# Altium PCB X4SIP02.PcbDoc
Units mm, origin at the board's own origin, x right, y up, seen from the top; angles counter-clockwise.
Board outline 16 x 16 mm, 6 copper layers (Top Layer, Inner1, Inner2, Inner3, Inner4, Bottom Layer), stack 0.811 mm thick; 15 components, 17 nets, 93 pads, 103 vias.
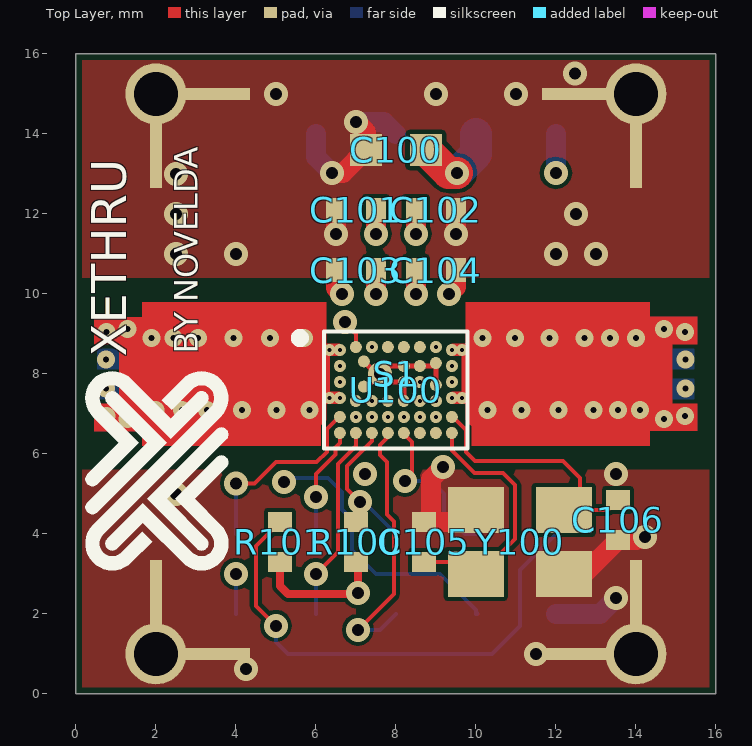
[diagram p0: Top Layer view]
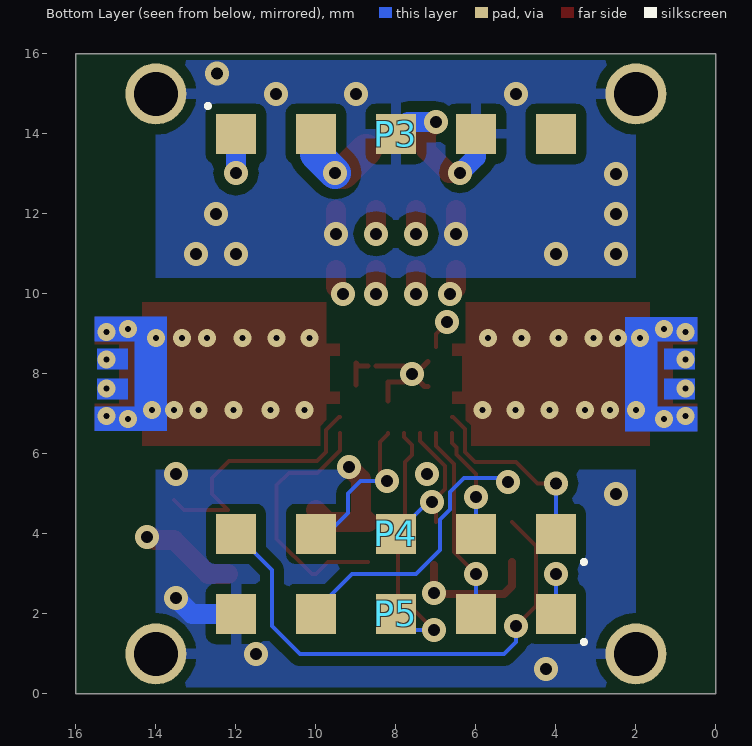
[diagram p1: Bottom Layer view, seen from below]
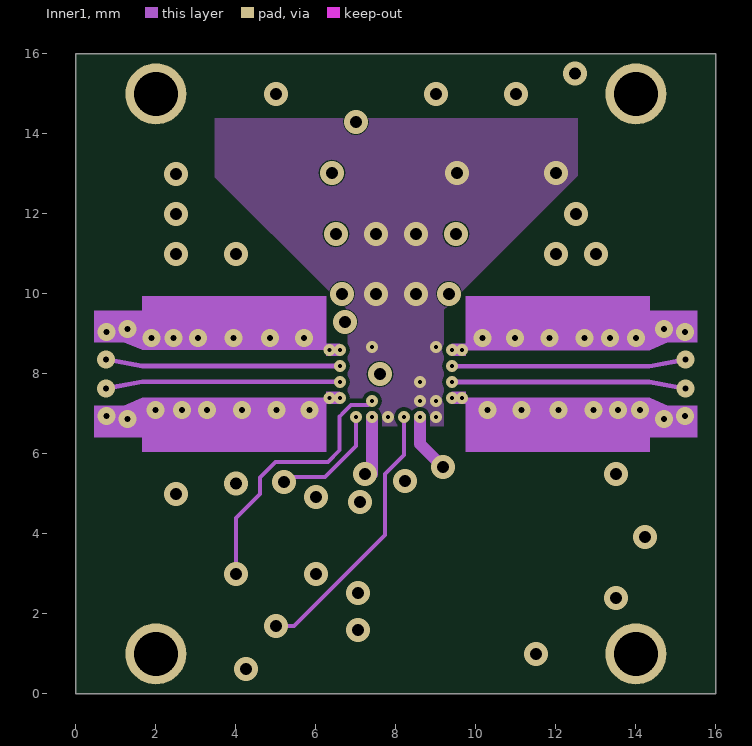
[diagram p2: Inner1]
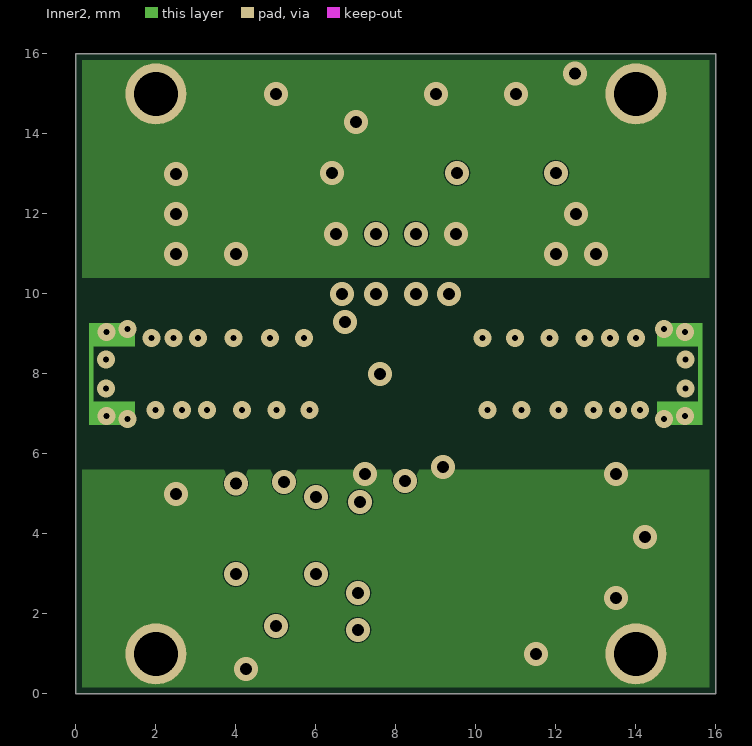
[diagram p3: Inner2]
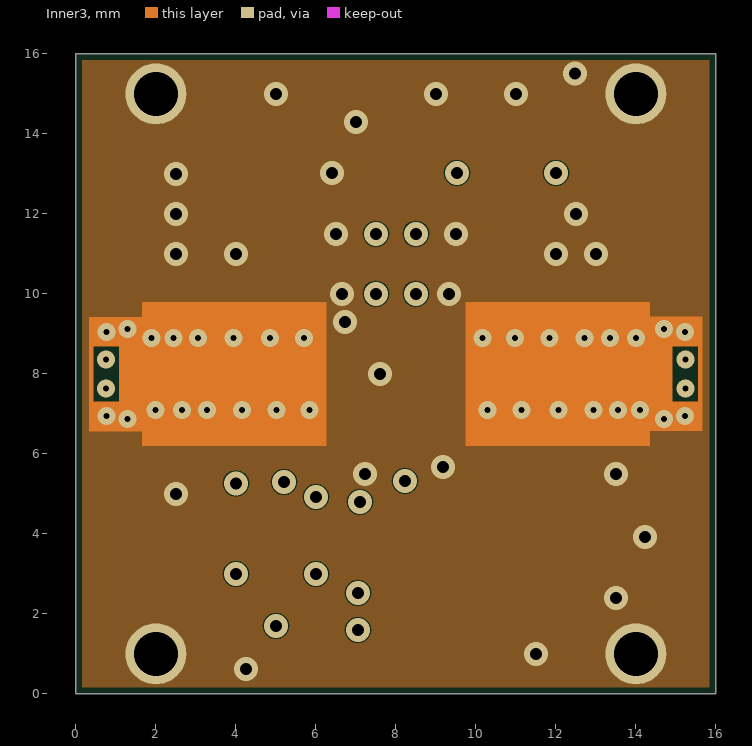
[diagram p4: Inner3]
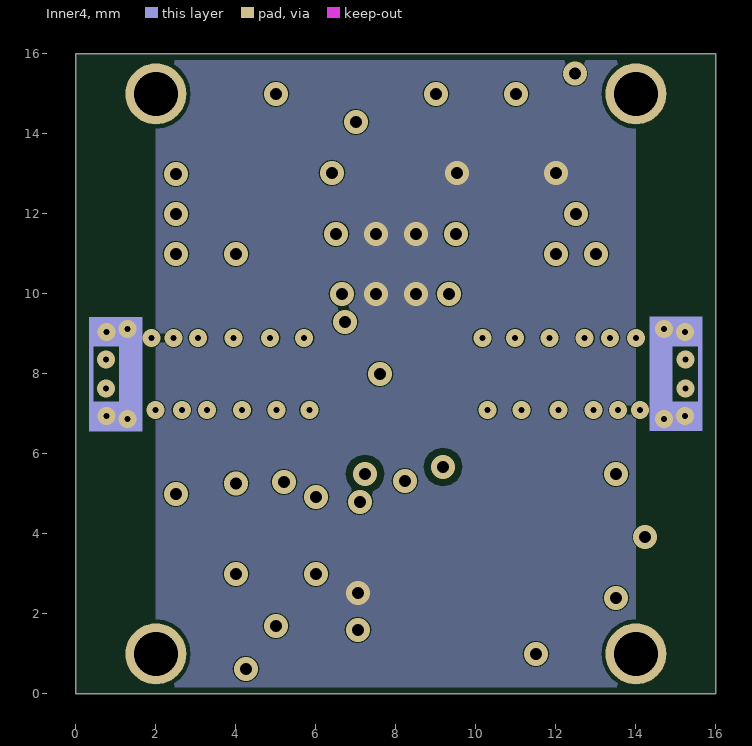
[diagram p5: Inner4]
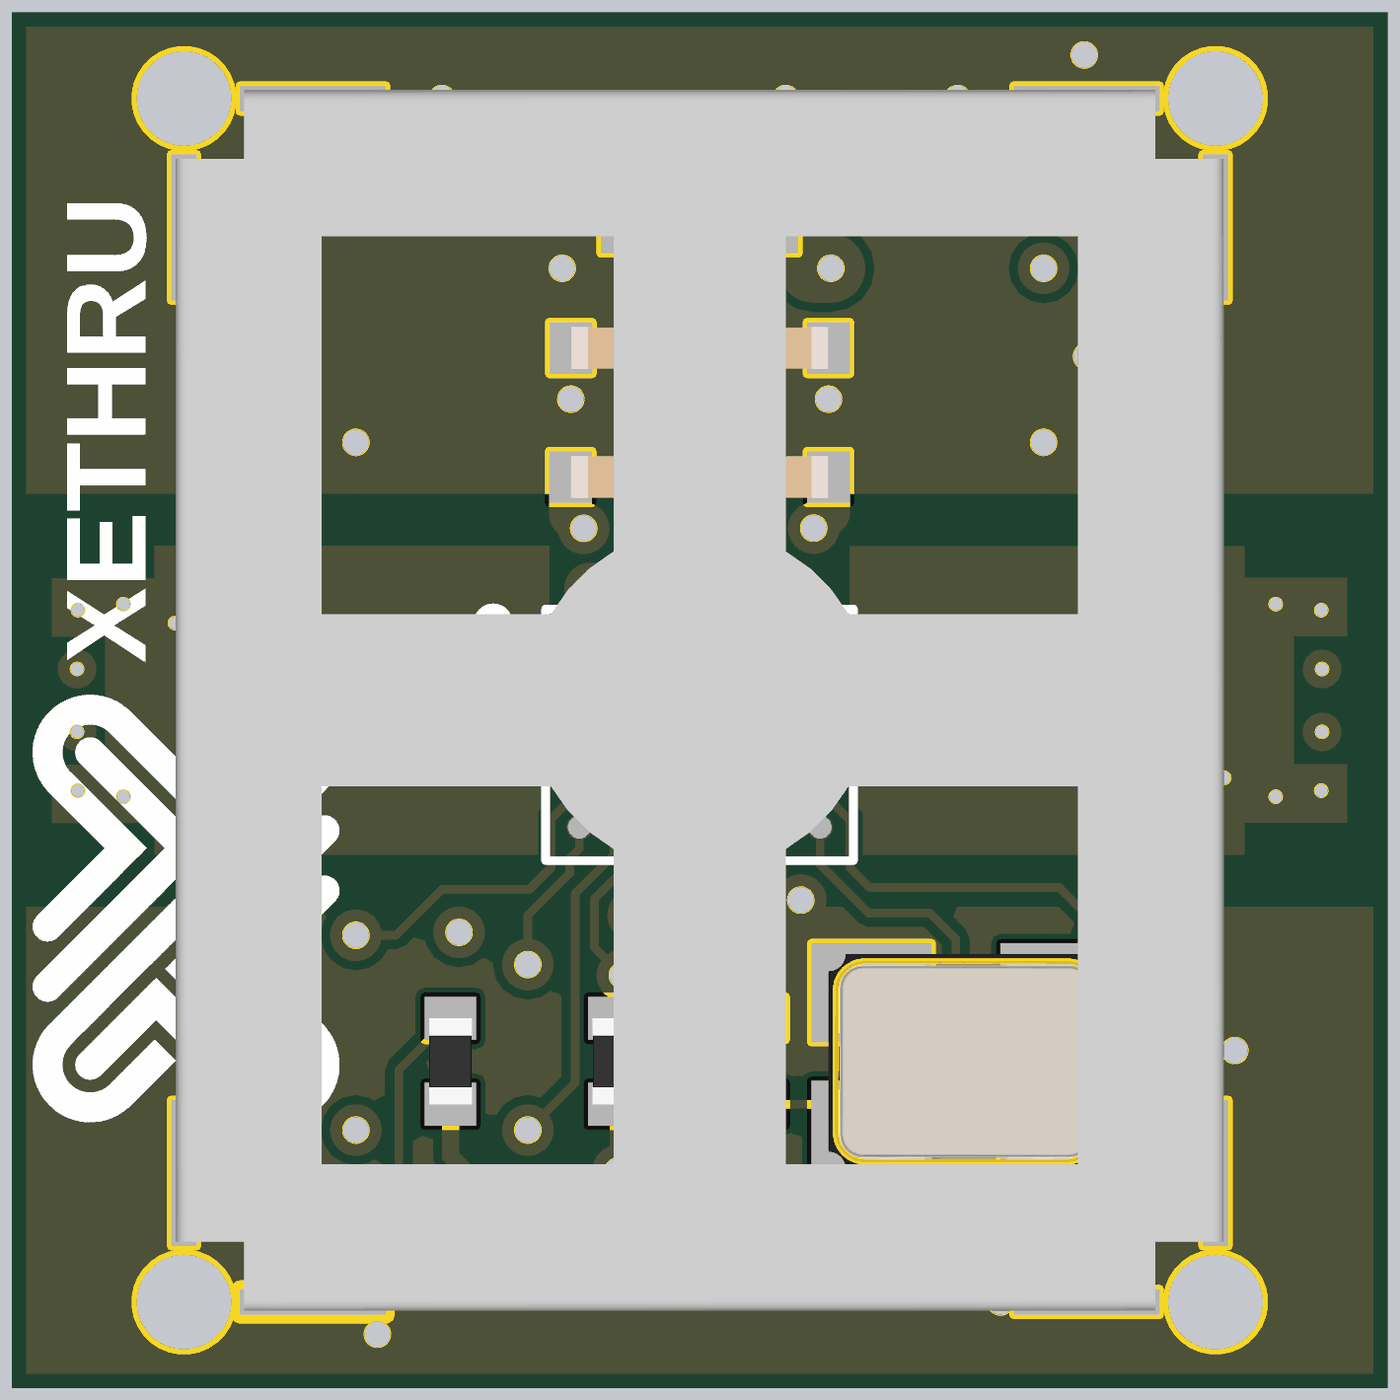
[diagram p6: 3D render of the assembled board from above, using the file's embedded part models]

## Layer stack, top to bottom
Top Solder: solder mask 0.0102, Solder Resist, Dk 3.5
Top Layer: signal copper 0.0356
Dielectric 1: prepreg 0.079, FR408 1080 Prepreg, Dk 3.43
Inner1: signal copper 0.017
Dielectric 2: prepreg 0.079, FR408 1080 Prepreg, Dk 3.43
Inner2: signal copper 0.017
Dielectric 3: core 0.356, FR408 3x 2116 Core, Dk 3.7
Inner3: signal copper 0.017
Dielectric 4: prepreg 0.079, FR408 1080 Prepreg, Dk 3.43
Inner4: signal copper 0.017
Dielectric 5: prepreg 0.079, FR408 1080 Prepreg, Dk 3.43
Bottom Layer: signal copper 0.0356
Bottom Solder: solder mask 0.0102, Solder Resist, Dk 3.5

## Board outline
0,0 16,0 16,16 0,16

## Design rules (kind name [scope] priority, off if disabled: settings)
BoardOutlineClearance BoardOutlineClearance_Text [IsText] p1: gap=0 ignorepadtopadclearanceinfootprint=FALSE
BoardOutlineClearance BoardOutlineClearance_CastellatedVias [InComponentClass('CastellatedVias')] p2: gap=0 ignorepadtopadclearanceinfootprint=FALSE
BoardOutlineClearance [All] p3: gap=0.15 ignorepadtopadclearanceinfootprint=FALSE
Clearance Clearance_GND_bottom_layer [InPolygonClass('GND_bottom_layer')] p1: gap=0.254 ignorepadtopadclearanceinfootprint=FALSE except(0: Arc-Hole Track-Hole SMDPad-Hole THPad-Hole Via-Hole Fill-Hole Poly-Hole Region-Hole Text-Hole)
Clearance Clearance_Blind [HoleSize <= 0.1] p2: gap=0.1 ignorepadtopadclearanceinfootprint=FALSE except(0: Arc-Hole Track-Hole SMDPad-Hole THPad-Hole Via-Hole Fill-Hole Poly-Hole Region-Hole Text-Hole)
Clearance Clearance_ViaHole [IsVia vs OnMid] p3: gap=0.15 ignorepadtopadclearanceinfootprint=FALSE except(0: Arc-Hole Track-Hole SMDPad-Hole THPad-Hole Via-Hole Fill-Hole Poly-Hole Region-Hole Text-Hole; 0.175: Via-Poly)
Clearance Clearance_Wide_Soldermask [SolderMaskExpansion  >= 0.1] p4: gap=0.2 ignorepadtopadclearanceinfootprint=FALSE except(0: Arc-Hole Track-Hole SMDPad-Hole THPad-Hole Via-Hole Fill-Hole Poly-Hole Region-Hole Text-Hole)
Clearance [All] p5: gap=0.1 ignorepadtopadclearanceinfootprint=FALSE except(0: Arc-Hole Track-Hole SMDPad-Hole THPad-Hole Via-Hole Fill-Hole Poly-Hole Region-Hole Text-Hole)
ComponentClearance ConnectionPads [HasFootprint('ALTIUM-0024') vs HasFootprint('ALTIUM-0024')] p1: gap=0 collisioncheckmode=3 verticalgap=0 showdistances=FALSE
ComponentClearance Testpoints [HasFootprint('ALTIUM-0001') vs HasFootprint('ALTIUM-0001')] p2: gap=0 collisioncheckmode=3 verticalgap=0 showdistances=FALSE
ComponentClearance [All] p3: gap=0.254 collisioncheckmode=3 verticalgap=0.254 showdistances=FALSE
HoleToHoleClearance HoleToHoleClearance_MicroVia [InDrillLayerPair('Top Layer - Inner1')] p1: gap=0.15 allowstackedmicrovias=TRUE
HoleToHoleClearance [All] p2: gap=0.35 allowstackedmicrovias=TRUE
MinimumAnnularRing "Castellated vias" [InComponentClass('Castellated Vias')] p1: minimumring=0.1
MinimumAnnularRing [Not IsVia] p2: minimumring=0.15
MinimumSolderMaskSliver [All] p1: minsoldermaskwidth=0.08
PlaneConnect [All] p1: planeconnectstyle=Direct reliefexpansion=0.508 reliefentries=4 reliefconductorwidth=0.254 reliefairgap=0.254
PolygonConnect GND_bottom_layer [InPolygonClass('GND_bottom_layer') vs Not IsVia] p1: connectstyle=Relief reliefconductorwidth=0.254 reliefentries=4 polygonreliefangle="90 Angle" airgapwidth=0.254
PolygonConnect [All] p2: connectstyle=Direct reliefconductorwidth=0.254 reliefentries=4 polygonreliefangle="90 Angle" airgapwidth=0.254
RoutingVias [All] p1: holewidth=0.3 width=0.6 viastyle="Through Hole" minholewidth=0.1 minwidth=0.3 maxholewidth=0.3 maxwidth=0.6
SilkToSolderMaskClearance [IsPad] p1: minsilkscreentomaskgap=0.18 clearancetoexposedcopper=TRUE
SolderMaskExpansion [All] p1: expansion=0.05
Width [All] p1: maxlimit=1 minlimit=0.1 preferedwidth=0.32
25 further rules are at their usual default settings.

## Classes and differential pairs
polygon class GND_bottom_layer: GND_L06_P022 GND_L06_P028
component class Top-Level: A1 P3 P4 P5 S1
component class U_X4: C100 C101 C102 C103 C104 C105 C106 R100 R101 U100 Y100

## Components (designator, comment, footprint, x,y, rotation, side; value= is the part's Value field where it differs from the comment)
C100 "4u7" 0603-CAPACITOR-NONPOL 7.998,13.598 r180 top
C101 "100n" 0402-CAPACITOR-NONPOL 7,12.098 r180 top
C102 "10n" 0402-CAPACITOR-NONPOL 8.998,12.098 r0 top
C103 "1n" 0402-CAPACITOR-NONPOL 6.998,10.598 r180 top
C104 "100p" 0402-CAPACITOR-NONPOL 8.998,10.598 r0 top
C105 "12p" 0402-CAPACITOR-NONPOL 8.7,3.8 r90 top
C106 "12p" 0402-CAPACITOR-NONPOL 13.55,4.35 r270 top
P3 "5x CONNECTION PADS" ALTIUM-0024 8,14 r180 bottom locked
P4 "5x CONNECTION PADS" ALTIUM-0024 8,4 r0 bottom locked
P5 "5x CONNECTION PADS" ALTIUM-0024 8,2 r0 bottom locked
R100 "10k" 0402-RESISTOR 7,3.8 r270 top
R101 "100k" 0402-RESISTOR 5.1,3.8 r270 top
S1 "Shield box" 200284-003 8,8 r0 top
U100 "XeThru X4" 200106-002 7.998,7.598 r0 top
Y100 "27MHz" 200281 11.098,3.798 r0 top

## Footprints (in the part's own frame and the unit in brackets; to place one, negate y for a bottom-side part, rotate by r counter-clockwise, add the part's x,y. Pads: shape width x height; smd on the part's side, far side on the other; paste and mask are expansions set on the pad)
0402-CAPACITOR-NONPOL [mm]
  rect 0.5x0.6 smd mask+0.051: 1(-0.5,0) 2(0.5,0)
  body extent -0.5,-0.25 0.5,0.25, height 0.49
0402-RESISTOR [mm]
  rect 0.5x0.6 smd mask+0.051: 1(-0.5,0) 2(0.5,0)
  body extent -0.5,-0.25 0.5,0.25, height 0.3
0603-CAPACITOR-NONPOL [mm] "Minimal footprint for high density"
  rect 0.8x0.8 smd: 1(-0.75,0) 2(0.75,0)
  body extent -0.8,-0.4 0.8,0.4, height 0.79
200106-002 [mm]
  round 0.3 smd paste-0.015 mask-0.05: A1(-1.398,1) A2(-0.998,1.074) A3(-0.597,1.074) A4(-0.198,1.074) A5(0.202,1.074) A6(0.603,1.074) A7(1.002,1.074) A8(1.402,1) B1(-1.398,0.6) B3(-0.798,0.714) B5(0.202,0.6) B6(0.603,0.6) B7(1.002,0.674) B8(1.402,0.6) C1(-1.398,0.2) C3(-0.798,0.086) C5(0.202,0.2) C6(0.603,0.2) C7(1.002,0.126) C8(1.402,0.2) D1(-1.398,-0.2) D2(-0.998,-0.274) D3(-0.597,-0.274) D4(-0.198,-0.274) D5(0.202,-0.274) D6(0.603,-0.274) D7(1.002,-0.274) D8(1.402,-0.2) E1(-1.398,-0.674) E2(-0.998,-0.674) E3(-0.597,-0.674) E4(-0.198,-0.674) E5(0.202,-0.674) E6(0.603,-0.674) E7(1.002,-0.674) E8(1.402,-0.674) F1(-1.398,-1.074) F2(-0.998,-1.074) F3(-0.598,-1.074) F4(-0.198,-1.074) F5(0.202,-1.074) F6(0.603,-1.074) F7(1.002,-1.074) F8(1.402,-1.074)
  silkscreen extent -2.5,-1.46 1.79,1.46, body extent -1.64,-1.31 1.64,1.31, height 0.58
200281 [mm]
  rect 1.4x1.15 smd: 1(-1.1,-0.8) 2(1.1,-0.8) 3(1.1,0.8) 4(-1.1,0.8)
  body extent -1.6,-1.25 1.6,1.25, height 0.6
200284-003 [mm]
  rect 0.3x1.7 smd: 1(-6,-5.5) 1(-6,5.5) 1(6,-5.5) 1(6,5.5)
  rect 1.7x0.3 smd mask+0.102: 1(-4.5,-7)
  rect 1.7x0.3 smd: 1(-4.5,7) 1(4.5,-7) 1(4.5,7)
  body extent -6.1,-7.1 6.1,7.1, height 3
ALTIUM-0024 [mm] "SMD CONNECTION PADS, 5, 0.6x0.6mm, 2mm PITCH"
  rect 1x1 smd paste-0.5: 1(-4,0) 2(-2,0) 3(0,0) 4(2,0) 5(4,0)
  silkscreen extent -4.75,0.65 -4.65,0.75

## Part data
C100: library part 200128, "CAPACITOR, 4u7, 0603, 10%, 10V, X5R", Manufacturer=--, ClassName=-, Component Category=Capacitor, Component Status=Active, ItemNo=200128, Notes=-, Supplier="Farnell Norge", SupplierCatNo=2320818
C101: library part 200010, "CAPACITOR, 100n, 0402, 10%, 10V, X5R", Manufacturer=--, Component Category=Capacitor, Component Status=Active, ItemNo=200010, Supplier="Farnell Norge", SupplierCatNo=1759380
C102: library part 200005, "CAPACITOR, 10n, 0402, 10%, 25V, X7R", Manufacturer=--, Component Category=Capacitor, Component Status=Active, ItemNo=200005, Supplier="Farnell Norge", SupplierCatNo=1758924
C103: library part 200205, "CAPACITOR, 1n, 0402, 10%, 25V, X7R", Manufacturer=--, ClassName=-, Component Category=Capacitor, Component Status=Active, ItemNo=200205, Notes=-, Supplier="Farnell Norge", SupplierCatNo=1758911
C104: library part 200107, "CAPACITOR, 100p, 0402, 20%, 50V, X7R", Manufacturer=--, ClassName=-, Component Category=Capacitor, Component Status=New, ItemNo=200107, Notes=-, Supplier="Farnell Norge", SupplierCatNo=1709605
C105 C106: library part 200239, "CAPACITOR, 12p, 0402, 5%, 50V, NP0", Manufacturer=--, ClassName=-, Component Category=Capacitor, Component Status=New, ItemNo=200239, Notes=-, Supplier="Farnell Norge", SupplierCatNo=1758943
P3 P4 P5: library part ALTIUM-0024, "SMD CONNECTION PADS, 5, 0.6x0.6mm, 2mm PITCH", Manufacturer=--, ClassName=-, Component Category=Misc, Component Status=Active, ItemNo=ALTIUM-0024, Notes=-
R100: library part 200026, "RESISTOR, 10k, 0402, 1%, 63mW", Manufacturer=--, Component Category=Resistor, Component Status=Active, ItemNo=200026, Supplier="Farnell Norge", SupplierCatNo=2331444
R101: library part 200027, "RESISTOR, 100k, 0402, 1%, 63mW", Manufacturer=--, Component Category=Resistor, Component Status=Active, ItemNo=200027, Supplier="Farnell Norge", SupplierCatNo=9239472
S1: library part 200284-003, "Shieldbox 14.2 x 12.2 x 3mm", Manufacturer=--, MPN=-, ClassName=-, Component Category=Misc, Component Status=New, ItemNo=200284-003, Notes=-
U100: library part 200260-002, Manufacturer=Novelda, ClassName=-, Component Category="Novelda IC", Component Status=New, ItemNo=200260-002, MPN=200260-002, Notes=-
Y100: library part 200281, "LFXTAL072115, CRYSTAL 27MHZ, 10PF, SMD", Manufacturer="IQD Frequency Products", MPN=LFXTAL072115, ClassName=-, Component Category=Crystal, Component Status=New, ItemNo=200281, Notes=-, Supplier="IQD Frequency Products Ltd", SupplierCatNo=LFXTAL072115

## Free pads (board coordinates)
  round 1.524 hole 1.1 mask-0.15: 3(2,15) 4(2,1) 5(14,1) 6(14,15)

## Via types
v1: diameter 0.6, hole 0.3, Top Layer to Bottom Layer, tented both sides, 43 vias
v2: diameter 0.45, hole 0.15, Top Layer to Bottom Layer, tented both sides, 36 vias
v3: diameter 0.3, hole 0.1, Top Layer to Inner1, tented both sides, 20 vias
v4: diameter 0.3, hole 0.1, Top Layer to Inner1, tented top, 4 vias

## Nets (pads, with @x,y where several pads share a name; then routed paths per layer and width w, separated by ;. In a path a pad name is that pad's centre, name@x,y a point inside that pad or via, vN(x,y) a via of type N, cw(c..) or ccw(c..) an arc to the next point about the centre after c; other vN are vias at no path point)
GND: C100.2 C101.2 C102.2 C103.2 C104.2 C105.2 C106.2 P3.3 P3.4 P5.5 pad.3 pad.4 pad.5 pad.6 S1.1 U100.A1 U100.A2 U100.A8 U100.B3 U100.B5 U100.B6 U100.B7 U100.C3 U100.C5 U100.C7 U100.D1 U100.D5 U100.D8 U100.E3 U100.E6 Y100.2 Y100.4 | length 21.6
  Top Layer w0.1: v1(6.725,9.3) 6.725,9.275 7,9 U100.A2
  Top Layer w0.127: U100.C3 7.284,7.684 v1(7.598,7.997) ; U100.B3 7.516,7.997 v1(7.598,7.997) ; U100.D5 U100.C5 7.797,7.798 v1(7.598,7.997) ; U100.B6@8.495,8.198 U100.B5 7.798,8.198 v1(7.598,7.997) ; U100.B6@8.705,8.198 8.926,8.198 U100.B7 U100.C7
  Top Layer w0.5: v1(6.4,13.025) 6.675,13.025 C100.2 7.248,14.052 v1(7,14.3) ; C103.2 6.498,10.152 v1(6.65,10) ; v1(6.5,11.503) C101.2 ; v1(9.175,5.675) 8.875,5.375 8.875,4.475 C105.2 9.7,4.3 Y100.4 ; v1(9.325,10.002) 9.498,10.175 C104.2 ; v1(9.498,11.502) C102.2 ; Y100.2 12.698,2.998 C106.2 14.019,3.85 14.094,3.925 v1(14.225,3.925)
  Inner1 w0.3: v1(7.225,5.5) 7.4,5.5 7.402,5.502 7.4,5.505 v3(7.4,6.924) ; v3(8.6,6.924) 8.6,6.25 v1(9.175,5.675)
  Bottom Layer w0.5: P3.4 6,13.425 v1(6.4,13.025) ; v1(7,14.3) 7.7,14.3 P3.3 ; P5.5 13.1,2 v1(13.5,2.4)
  other v1: 4.25,0.625 11.5,1 2.5,5 13.5,5.5 2.5,11 4,11 12,11 13,11 2.5,12 12.5,12 2.5,13 5,15 9,15 11,15 12.473,15.506
  other v2: 1.296,6.878 14.7,6.878 0.766,6.948 15.229,6.948 1.996,7.098 2.646,7.098 3.276,7.098 4.155,7.098 5.016,7.098 5.836,7.098 10.292,7.098 11.14,7.098 12.059,7.098 12.941,7.098 13.55,7.098 14.102,7.098 1.894,8.898 2.445,8.898 3.055,8.898 3.936,8.898 4.856,8.898 5.704,8.898 10.159,8.898 10.98,8.898 11.841,8.898 12.72,8.898 13.35,8.898 14,8.898 0.766,9.048 15.229,9.048 1.296,9.118 14.7,9.118
  other v3: 6.346,7.398 9.4,7.398 9.65,7.398 6.346,8.598 9.4,8.598 9.65,8.598
  other v4: 6.6,7.398 6.6,8.598
QSPI_IO0/SPI_MOSI: P5.2 U100.F2 | length 4.9
  Top Layer w0.1: v1(6,3) 6,2.998 6.55,3.548 6.55,5.75 7,6.2 U100.F2
  Bottom Layer w0.1: P5.2 v1(6,3)
QSPI_IO1/SPI_MISO: P4.3 R100.1 U100.F3 | length 3.9
  Top Layer w0.1: R100.1 7,4.7 v1(7.1,4.8) 6.775,5.125 6.775,5.692 7.4,6.317 U100.F3
  Bottom Layer w0.1: v1(7.1,4.8) 7.2,4.8 P4.3
QSPI_IO2: P5.3 U100.F4 | length 6.6
  Top Layer w0.1: v1(7.05,1.6) 7.95,2.5 7.95,4.314 7.775,4.489 7.775,5.801 7.6,5.976 7.6,6.224 7.8,6.424 U100.F4
  Bottom Layer w0.1: v1(7.05,1.6) 7.6,1.6 P5.3
QSPI_IO3: P4.4 U100.F5 | length 4
  Top Layer w0.1: U100.F5 8.2,6.5 8.4,6.3 8.4,5.5 v1(8.225,5.325)
  Bottom Layer w0.1: v1(8.225,5.325) 8.882,5.325 9.198,5.009 9.198,4.528 9.725,4 P4.4
QSPI_NSS/SPI_NSS: P5.4 U100.E2 | length 10
  Inner1 w0.1: v1(5.2,5.3) 5.325,5.425 6.225,5.425 7.002,6.202 7,6.205 v3(7,6.924)
  Bottom Layer w0.1: v1(5.2,5.3) 5.3,5.4 6.3,5.4 6.65,5.05 6.65,4.614 6.9,4.364 6.9,3.6 7.5,3 9.1,3 10,2.1 P5.4 10.022,2.022 P5.4@10.043,2
QSPI_SCLK/SPI_SCLK: P4.2 U100.F1 | length 2.8
  Top Layer w0.1: v1(6,4.925) 6,5.497 6.488,5.985 6.488,6.163 6.6,6.275 U100.F1
  Bottom Layer w0.1: P4.2 v1(6,4.925)
RFIN_N: U100.C1
  other v2: 0.756,7.633
  other v4: 6.6,7.798
RFIN_P: U100.B1
  other v2: 0.756,8.364
  other v4: 6.6,8.198
RFOUT_N: U100.C8
  other v2: 15.239,7.632
  other v3: 9.4,7.798
RFOUT_P: U100.B8
  other v2: 15.239,8.363
  other v3: 9.4,8.198
VDD3V: C100.1 C101.1 C102.1 C103.1 C104.1 P3.1 P3.2 R100.2 R101.2 U100.A3 U100.A7 U100.C6 U100.D6 U100.D7 U100.E4 U100.E7 | length 8.9
  Top Layer w0.2: R101.2 5.1,2.7 5.3,2.5 7.025,2.5 v1(7.05,2.525) R100.2@7.05,3.225
  Top Layer w0.5: v1(7.498,10.002) C103.1 ; v1(7.5,11.5) C101.1 ; v1(8.498,10.002) C104.1 ; v1(8.498,11.502) C102.1
  Top Layer w0.8: C100.1 9.321,13.025 v1(9.525,13.025)
  Bottom Layer w0.5: v1(12,13.025) P3.1
  Bottom Layer w0.8: v1(9.525,13.025) 10,13.5 P3.2
  other v3: 7.8,6.924 9,6.924 8.6,7.324 9,7.324 8.6,7.798 7.4,8.672 9,8.672
X4_ENABLE: P4.5 R101.1 U100.E5 | length 19.5
  Top Layer w0.1: v1(5,1.7) 4.5,2.2 4.5,3.7 R101.1
  Inner1 w0.1: v1(5,1.7) 5.45,1.7 7.725,3.975 7.725,5.501 8.2,5.976 v3(8.2,6.924)
  Bottom Layer w0.1: v1(5,1.7) 5,1.3 5.3,1 10.4,1 11.1,1.7 11.1,3.1 P4.5
X4_IO1: P4.1 U100.E1 | length 4.9
  Top Layer w0.1: v1(4,5.266) 4.466,5.266 5,5.8 6.02,5.8 6.273,6.053 6.273,6.621 6.576,6.924 U100.E1
  Bottom Layer w0.1: P4.1 v1(4,5.266)
X4_IO2: P5.1 U100.D3 | length 7.7
  Inner1 w0.1: v1(4,3) 4,4.4 4.6,5 4.6,5.407 4.993,5.8 6.303,5.8 6.596,6.093 6.596,6.941 6.7,7.045 6.7,7.048 6.876,7.224 7.3,7.224 v3(7.4,7.324)
  Bottom Layer w0.1: P5.1 v1(4,3)
XIN27: C105.1 U100.F8 Y100.1 | length 6.5
  Top Layer w0.1: C105.1 9.696,3.3 Y100.1 10.103,2.998 10.98,3.875 10.98,5.22 10.677,5.523 9.964,5.523 9.4,6.087 U100.F8
XOUT27: C106.1 U100.E8 Y100.3 | length 6.6
  Top Layer w0.1: U100.E8 9.424,6.924 9.748,6.601 9.748,6.052 9.977,5.823 12.177,5.823 12.6,5.4 12.6,5 Y100.3 13.298,4.598 C106.1
pads on no net: P3.5 U100.A4 U100.A5 U100.A6 U100.D2 U100.D4 U100.F6 U100.F7

## Polygon pours and split planes (outlines as drawn)
GND on Inner3 "GND_L04_P004" (solid, remove dead copper, pour order 4): 0,16 16,16 16,0 0,0
VDD3V on Inner1 "GND_L08_P-001" (solid, remove dead copper, pour order 16): 6.798,6.697 9.198,6.697 9.198,9.6 12.55,12.953 12.55,14.397 3.475,14.397 3.475,12.922 6.798,9.6 6.798,8.798
GND on Top Layer "GND_L01_P020" (solid, remove dead copper, pour order 20): 16,0 0,0 0,5.6 16,5.6
GND on Top Layer "GND_L01_P018" (solid, remove dead copper, pour order 18): 0,16 16,16 16,10.4 0,10.4
GND on Bottom Layer "GND_L06_P028" (solid, remove dead copper, pour order 28): 2,16 14,16 14,10.4 2,10.4
GND on Bottom Layer "GND_L06_P022" (solid, remove dead copper, pour order 22): 14,0 2,0 2,5.6 14,5.6
GND on Inner2 "GND_L03_P034" (solid, remove dead copper, pour order 34): 0,16 16,16 16,10.4 0,10.4
GND on Inner2 "GND_L03_P032" (solid, remove dead copper, pour order 32): 16,0 0,0 0,5.6 16,5.6
VDD3V on Inner4 "VDD3V_L05_P030" (solid, remove dead copper, pour order 30): 2,16 14,16 14,0 2,0

## Other copper
Top Layer:
  region net GND: 1.655,6.571 0.464,6.571 0.464,7.252 1.081,7.252 1.081,8.74 0.464,8.74 0.464,9.421 1.655,9.421
  region net GND: 6.255,6.848 6.255,9.797 1.655,9.797 1.655,6.2 6.123,6.2 6.123,6.715
  region net GND: 6.596,8.448 6.263,8.448 6.263,8.748 6.596,8.748
  region net GND: 6.344,7.298 6.255,7.298 6.255,8.743 6.344,8.743
  region net GND: 6.596,7.248 6.596,7.548 6.255,7.548 6.255,7.248
  region net GND: 9.4,8.748 9.4,8.448 9.74,8.448 9.74,8.748
  region net GND: 9.651,8.699 9.74,8.699 9.74,7.253 9.651,7.253
  region net GND: 9.4,7.548 9.733,7.548 9.733,7.248 9.4,7.248
  region net GND: 9.74,9.796 9.74,6.848 9.898,6.691 9.898,6.199 14.34,6.199 14.34,9.796
  region net GND: 14.34,9.425 15.532,9.425 15.532,8.744 14.914,8.744 14.914,7.256 15.532,7.256 15.532,6.575 14.34,6.575
  text ".Layer_Name" at 3.05,-12.202 h1
Inner1:
  region net RFIN_P: 6.596,8.143 6.596,8.253 1.655,8.253 0.759,8.418 0.738,8.311 1.645,8.143
  region net RFIN_N: 1.655,7.75 0.759,7.585 0.738,7.691 1.645,7.859 6.596,7.859 6.596,7.75
  region net GND: 6.596,8.448 6.255,8.448 6.255,8.748 6.596,8.748
  region net GND: 6.596,7.248 6.596,7.548 6.255,7.548 6.255,7.248
  region net GND: 6.255,8.598 6.255,9.947 1.655,9.947 1.655,8.598
  region net GND: 1.655,8.598 1.201,8.794 0.464,8.794 0.464,9.576 1.655,9.576
  region net GND: 6.255,6.05 6.255,6.848 6.255,7.399 1.655,7.399 1.655,6.05
  region net GND: 1.655,6.421 1.655,7.399 1.201,7.204 0.464,7.204 0.464,6.421
  region net GND: 14.34,9.575 14.34,8.597 14.795,8.792 15.532,8.792 15.532,9.575
  region net GND: 9.74,9.946 9.74,8.597 14.34,8.597 14.34,9.946
  region net GND: 14.34,7.398 14.795,7.202 15.532,7.202 15.532,6.42 14.34,6.42
  region net GND: 9.74,7.398 9.74,6.848 9.74,6.049 14.34,6.049 14.34,7.398
  region net GND: 9.4,8.748 9.4,8.448 9.74,8.448 9.74,8.748
  region net GND: 9.4,7.548 9.74,7.548 9.74,7.248 9.4,7.248
  region net RFOUT_P: 14.34,8.246 15.237,8.411 15.257,8.305 14.35,8.137 9.4,8.137 9.4,8.246
  region net RFOUT_N: 9.4,7.853 9.4,7.743 14.34,7.743 15.237,7.578 15.257,7.685 14.35,7.853
  text ".Layer_Name" at 3.05,-12.202 h1
Inner2:
  region net GND: 0.431,7.173 0.331,7.173 0.331,8.819 0.431,8.819
  region net GND: 1.465,6.724 0.331,6.724 0.331,7.308 1.465,7.308
  region net GND: 1.465,8.689 1.465,9.269 0.331,9.269 0.331,8.689
  region net GND: 14.531,7.307 14.531,6.727 15.664,6.727 15.664,7.307
  region net GND: 14.531,9.273 15.664,9.273 15.664,8.688 14.531,8.688
  region net GND: 15.564,8.823 15.664,8.823 15.664,7.177 15.564,7.177
  text ".Layer_Name" at 3.05,-12.202 h1
Inner3:
  pour cut-out: 0.431,8.688 1.081,8.688 1.081,7.307 0.431,7.307
  pour cut-out: 14.914,8.689 15.563,8.689 15.564,8.688 15.564,7.308 14.914,7.308
  region net GND: 1.655,6.571 0.331,6.571 0.331,7.308 1.081,7.308 1.081,8.689 0.331,8.689 0.331,9.421 1.655,9.421
  region net GND: 0.431,7.173 0.431,8.819 0.331,8.819 0.331,7.173
  region net GND: 6.255,6.2 1.655,6.2 1.655,9.797 6.255,9.797
  region net GND: 9.74,9.796 14.34,9.796 14.34,6.199 9.74,6.199
  region net GND: 15.564,8.823 15.564,7.177 15.664,7.177 15.664,8.823
  region net GND: 14.34,9.425 15.664,9.425 15.664,8.688 14.914,8.688 14.914,7.307 15.664,7.307 15.664,6.575 14.34,6.575
  text ".Layer_Name" at 3.05,-12.202 h1
Inner4:
  pour cut-out: 0,10 2,10 2,6 0,6
  pour cut-out: 16,10 14,10 14,6 16,6
  region net GND: 1.655,6.571 0.331,6.571 0.331,7.308 1.081,7.308 1.081,8.689 0.331,8.689 0.331,9.421 1.655,9.421
  region net GND: 0.431,7.173 0.331,7.173 0.331,8.819 0.431,8.819
  region net GND: 15.564,8.823 15.664,8.823 15.664,7.177 15.564,7.177
  region net GND: 14.34,9.425 15.664,9.425 15.664,8.688 14.914,8.688 14.914,7.307 15.664,7.307 15.664,6.575 14.34,6.575
  text ".Layer_Name" at 3.05,-12.202 h1
Bottom Layer:
  region net GND: 2.265,6.571 2.265,9.421 1.465,9.421 1.465,6.571
  region net GND: 13.731,9.425 13.731,6.575 14.531,6.575 14.531,9.425
  region net GND: 14.531,9.425 15.532,9.425 15.532,8.823 14.531,8.823
  region net GND: 14.531,7.177 15.532,7.177 15.532,6.575 14.531,6.575
  region net RFOUT_P: 14.698,8.63 14.698,8.119 15.463,8.119 15.463,8.63
  region net RFOUT_N: 14.698,7.881 15.463,7.881 15.463,7.37 14.698,7.37
  region net RFIN_P: 1.297,8.115 0.533,8.115 0.533,8.626 1.297,8.626
  region net RFIN_N: 1.297,7.366 1.297,7.877 0.533,7.877 0.533,7.366
  region net GND: 1.465,8.819 0.464,8.819 0.464,9.421 1.465,9.421
  region net GND: 1.465,6.571 0.464,6.571 0.464,7.173 1.465,7.173
  text ".Layer_Name" at 3.05,-12.202 h1

## Silkscreen, mask and mechanical layers (free items; w line width, h text height)
Top Overlay:
  region: 1.57,6.278 0.681,7.167 cw(c0.908,7.394) 0.681,7.621 cw(c0.908,7.394) 1.135,7.621 2.375,6.382 3.264,7.271 ccw(c3.141,7.394) 3.315,7.394 ccw(c3.141,7.394) 3.264,7.517 ccw(c3.141,7.394) 3.017,7.517 2.375,6.875 1.382,7.868 ccw(c0.908,7.395) 0.434,7.868 ccw(c0.908,7.394) 0.434,6.92 1.077,6.278 0.289,5.491 ccw(c0.413,5.367) 0.289,5.244 ccw(c0.413,5.367) 0.536,5.244
  region: 0.29,4.79 1.778,6.278 0.785,7.271 cw(c0.908,7.394) 0.785,7.517 cw(c0.908,7.394) 1.032,7.517 2.271,6.278 0.536,4.543 cw(c0.413,4.666) 0.29,4.543 cw(c0.413,4.666)
  region: 1.904,3.807 1.657,4.054 1.135,3.532 cw(c0.908,3.759) 0.681,3.532 cw(c0.909,3.759) 0.681,3.987 3.614,6.92 ccw(c3.139,7.394) 3.614,7.868 ccw(c3.141,7.395) 2.667,7.868 2.145,7.346 2.392,7.1 2.913,7.621 cw(c3.141,7.394) 3.368,7.621 cw(c3.14,7.394) 3.368,7.167 0.434,4.233 ccw(c0.909,3.759) 0.434,3.286 ccw(c0.908,3.759) 1.382,3.286
  region: 3.264,3.636 ccw(c3.14,3.759) 3.264,3.883 2.271,4.876 3.759,6.364 ccw(c3.636,6.487) 3.81,6.487 ccw(c3.636,6.487) 3.759,6.61 ccw(c3.636,6.487) 3.513,6.61 1.778,4.876 3.017,3.636 ccw(c3.141,3.759)
  region: 3.368,3.532 cw(c3.141,3.759) 2.913,3.532 1.674,4.772 0.785,3.883 ccw(c0.908,3.759) 0.785,3.636 ccw(c0.908,3.759) 1.032,3.636 1.674,4.278 2.667,3.286 ccw(c3.141,3.759) 3.614,3.286 ccw(c3.141,3.759) 3.614,4.233 2.972,4.876 3.759,5.663 ccw(c3.636,5.786) 3.759,5.909 ccw(c3.636,5.786) 3.513,5.909 2.479,4.876 3.368,3.987 cw(c3.141,3.759)
  text "BY NOVELDA" at 3.25,8.5 h1 r90
  text "XETHRU" at 1.55,8.429 h1.5 r90
  text ".Layer_Name" at 3.05,-13.202 h1
Bottom Overlay:
  text ".Layer_Name" at 3.05,-13.202 h1
Top Paste:
  text ".Layer_Name" at 3.05,-12.202 h1
Bottom Paste:
  text ".Layer_Name" at 3.05,-12.202 h1
Top Solder:
  text ".Layer_Name" at 3.05,-12.202 h1
Bottom Solder:
  text ".Layer_Name" at 3.05,-12.202 h1
Board Outline:
  the board outline again, w0.2
  text ".Layer_Name" at 3.05,-12.202 h1
Project Info:
  lines w0.05: -1.2,-13.452 19.3,-13.452 ; -1.2,-11.452 19.3,-11.452 ; -1.2,-10.452 19.3,-10.452 ; -1.2,-9.452 19.3,-9.452 ; 2.8,-13.452 2.8,-8.452 ; 6.625,-14.452 6.625,-13.452 ; -1.2,-14.452 -1.2,-8.452 19.3,-8.452 19.3,-14.452 ; -1.2,-14.452 19.3,-14.452 ; -1.2,-14.452 -1.2,-15.452 19.3,-15.452 19.3,-14.452
  text "ItemNo" at -0.95,-9.202 h1
  text ".PCB_ItemNo" at 3.05,-9.202 h1
  text "Date" at -0.95,-10.202 h1
  text ".PCB_Date" at 3.05,-10.202 h1
  text "Project" at -0.95,-11.202 h1
  text ".PCBA_ProjectName" at 3.05,-11.202 h1
  text "Layer" at -0.95,-12.202 h1
  text "Classification" at -0.95,-14.202 h1
  text "'.PCB_Classification'" at 6.875,-14.202 h1
  text "Copyright (c) Novelda 2018" at -0.95,-15.202 h1
Technical Drawing:
  text "View from top side" at -2.011,17.113 h0.5
  text "N/C" at 4.125,15 h0.5 r90
  text "GND" at 6.125,15 h0.5 r90
  text "GND" at 8.125,15 h0.5 r90
  text "VDD3V" at 10.125,15 h0.5 r90
  text "VDD3V" at 12.125,15 h0.5 r90
  text "1" at 12.989,13.863 h0.5
  text "P3" at 7.739,12.738 h0.5
  text "1" at 0.989,9.738 h0.5 r90
  text "GND" at -1.136,8.988 h0.5
  text "GND" at 16.239,8.988 h0.5
  text "RFIN_P" at -2.011,8.238 h0.5
  text "RFOUT_P" at 16.239,8.238 h0.5
  text "P1" at 1.989,7.863 h0.5 r90
  text "P2" at 14.489,7.863 h0.5 r90
  text "RFIN_N" at -2.011,7.488 h0.5
  text "RFOUT_N" at 16.239,7.488 h0.5
  text "GND" at -1.136,6.738 h0.5
  text "GND" at 16.239,6.738 h0.5
  text "1" at 15.239,6.113 h0.5 r90
  text "X4_IO1" at 4.125,5 h0.5 r90
  text "QSPI_SCLK/SPI_SCLK" at 6.125,5 h0.5 r90
  text "QSPI_IO1/SPI_MISO" at 8.125,5 h0.5 r90
  text "QSPI_IO3" at 10.125,5 h0.5 r90
  text "X4_ENABLE" at 12.125,5 h0.5 r90
  text "P4" at 1.989,3.863 h0.5
  text "1" at 2.989,3.863 h0.5
  text "P5" at 1.989,1.863 h0.5
  text "1" at 2.989,1.863 h0.5
  text "GND" at 12.125,0.025 h0.5 r90
  text "X4_IO2" at 4.125,-0.5 h0.5 r90
  text "QSPI_IO2" at 8.125,-1 h0.5 r90
  text "QSPI_IO0/SPI_MOSI" at 6.125,-3.225 h0.5 r90
  text "QSPI_NSS/SPI_NSS" at 10.125,-3.225 h0.5 r90
Technical Drawing Bottom:
  circle w0.1: c2,15 r0.55
  circle w0.1: c14,15 r0.55
  circle w0.1: c2,1 r0.55
  circle w0.1: c14,1 r0.55
  rectangle: 11.5,13.5 12.5,14.5
  rectangle: 9.5,13.5 10.5,14.5
  rectangle: 7.5,13.5 8.5,14.5
  rectangle: 5.5,13.5 6.5,14.5
  rectangle: 3.5,13.5 4.5,14.5
  rectangle: 5.5,13.5 6.5,14.5
  rectangle: 5.5,13.5 6.5,14.5
  rectangle: 3.5,3.5 4.5,4.5
  rectangle: 5.5,3.5 6.5,4.5
  rectangle: 7.5,3.5 8.5,4.5
  rectangle: 9.5,3.5 10.5,4.5
  rectangle: 11.5,3.5 12.5,4.5
  rectangle: 11.5,1.5 12.5,2.5
  rectangle: 9.5,1.5 10.5,2.5
  rectangle: 7.5,1.5 8.5,2.5
  rectangle: 5.5,1.5 6.5,2.5
  rectangle: 3.5,1.5 4.5,2.5
  rectangle: 0.533,8.115 1.297,8.626
  rectangle: 0.464,8.819 1.465,9.421
  rectangle: 0.533,7.366 1.297,7.877
  rectangle: 0.464,6.571 1.465,7.173
  rectangle: 14.531,8.823 15.532,9.425
  rectangle: 14.698,8.119 15.463,8.63
  rectangle: 14.698,7.37 15.463,7.881
  rectangle: 14.531,6.575 15.532,7.177
Testpoint Documentation:
  text ".Layer_Name" at 3.05,-12.202 h1
Top Dimensions:
  text ".Layer_Name" at 3.05,-12.202 h1
Top Designator and Assembly:
  text ".Layer_Name" at 3.05,-12.202 h1
Bottom Designator and Assembly:
  text ".Layer_Name" at 19.05,-12.202 h1
Mechanical 20:
  lines w0.05: 0.464,6.571 1.465,7.173 ; 0.464,7.173 1.465,6.571 ; 0.464,8.819 1.465,9.421 ; 0.464,9.421 1.465,8.819 ; 0.533,7.366 1.297,7.877 ; 0.533,7.877 1.297,7.366 ; 0.533,8.115 1.297,8.626 ; 0.533,8.626 1.297,8.115 ; 14.531,6.575 15.532,7.177 ; 14.531,7.177 15.532,6.575 ; 14.531,8.823 15.532,9.425 ; 14.531,9.425 15.532,8.823 ; 14.698,7.37 15.463,7.881 ; 14.698,7.881 15.463,7.37 ; 14.698,8.119 15.463,8.63 ; 14.698,8.63 15.463,8.119

## Dimensions
0,0 to 2,1 on Technical Drawing Bottom
3.5,13.5 to 4.5,13.5 on Technical Drawing Bottom
3.5,14.5 to 3.5,13.5 on Technical Drawing Bottom
1.297,7.877 to 1.297,7.366 on Technical Drawing Bottom
1.465,7.173 to 1.465,6.571 on Technical Drawing Bottom
1.297,8.626 to 1.297,8.115 on Technical Drawing Bottom
1.465,9.421 to 1.465,8.819 on Technical Drawing Bottom
16,0 to 14.55,1 on Technical Drawing Bottom
0,0 to 0.464,6.571 on Technical Drawing Bottom
0,0 to 0.464,6.571 on Technical Drawing Bottom
16,0 to 15.532,6.571 on Technical Drawing Bottom
0,0 to 16,0 on Top Dimensions
0,16 to 1.465,9.421 on Technical Drawing Bottom
0,0 to 0,16 on Top Dimensions